# Altium PCB CRM100.PcbDoc
Units mm, origin at the board's own origin, x right, y up, seen from the top; angles counter-clockwise.
Board outline 20 x 22.95 mm, 2 copper layers (Top Layer, Bottom Layer); 8 components, 12 nets, 48 pads, 9 vias.
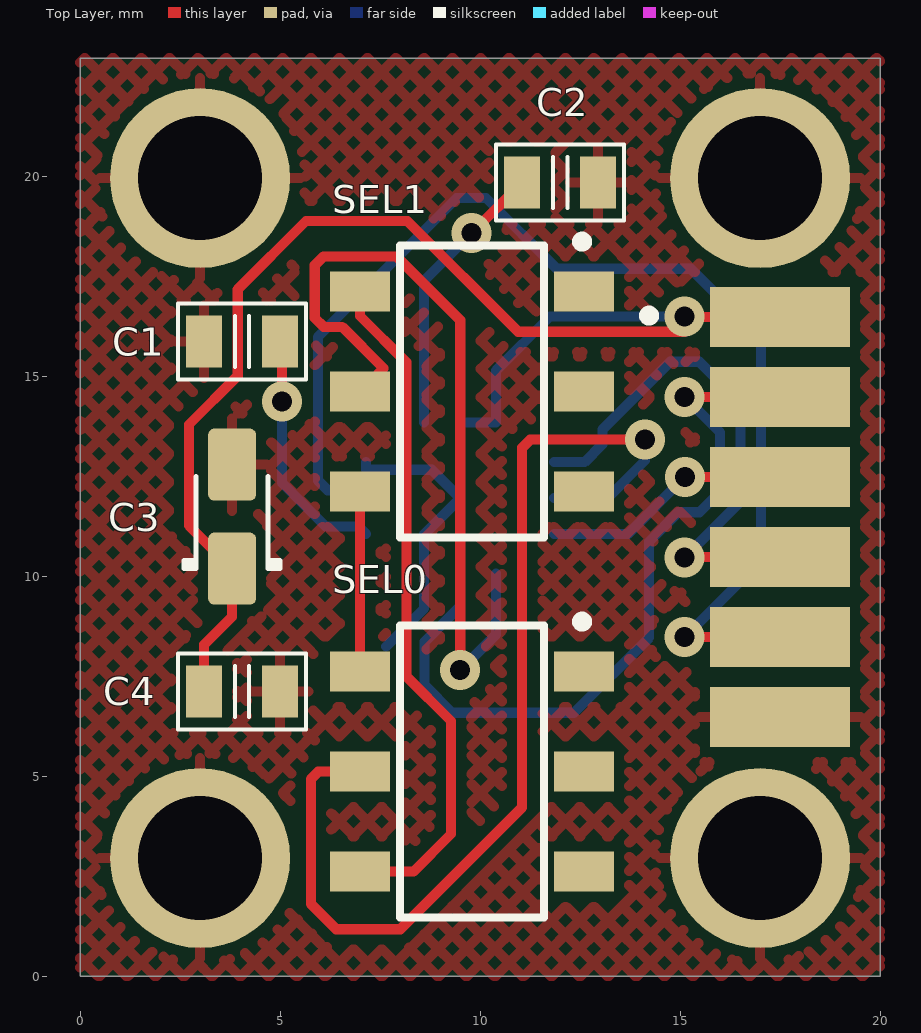
[diagram p0: Top Layer view]
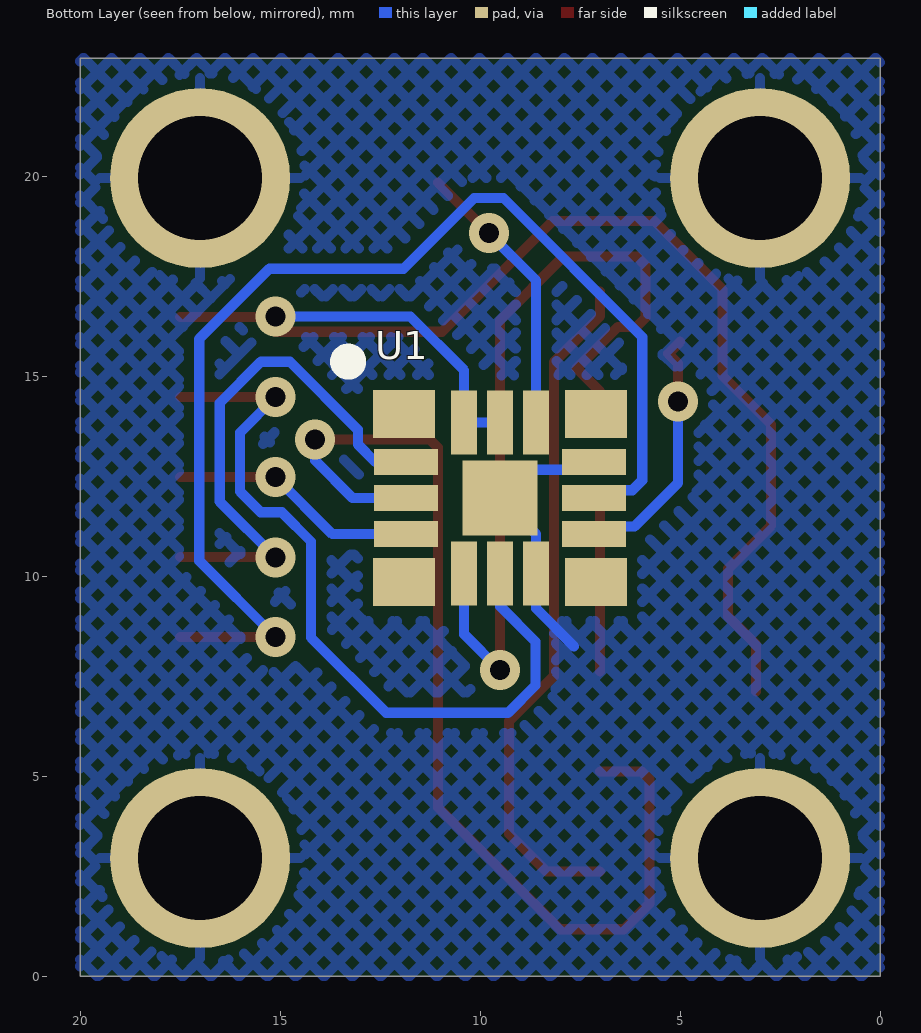
[diagram p1: Bottom Layer view, seen from below]
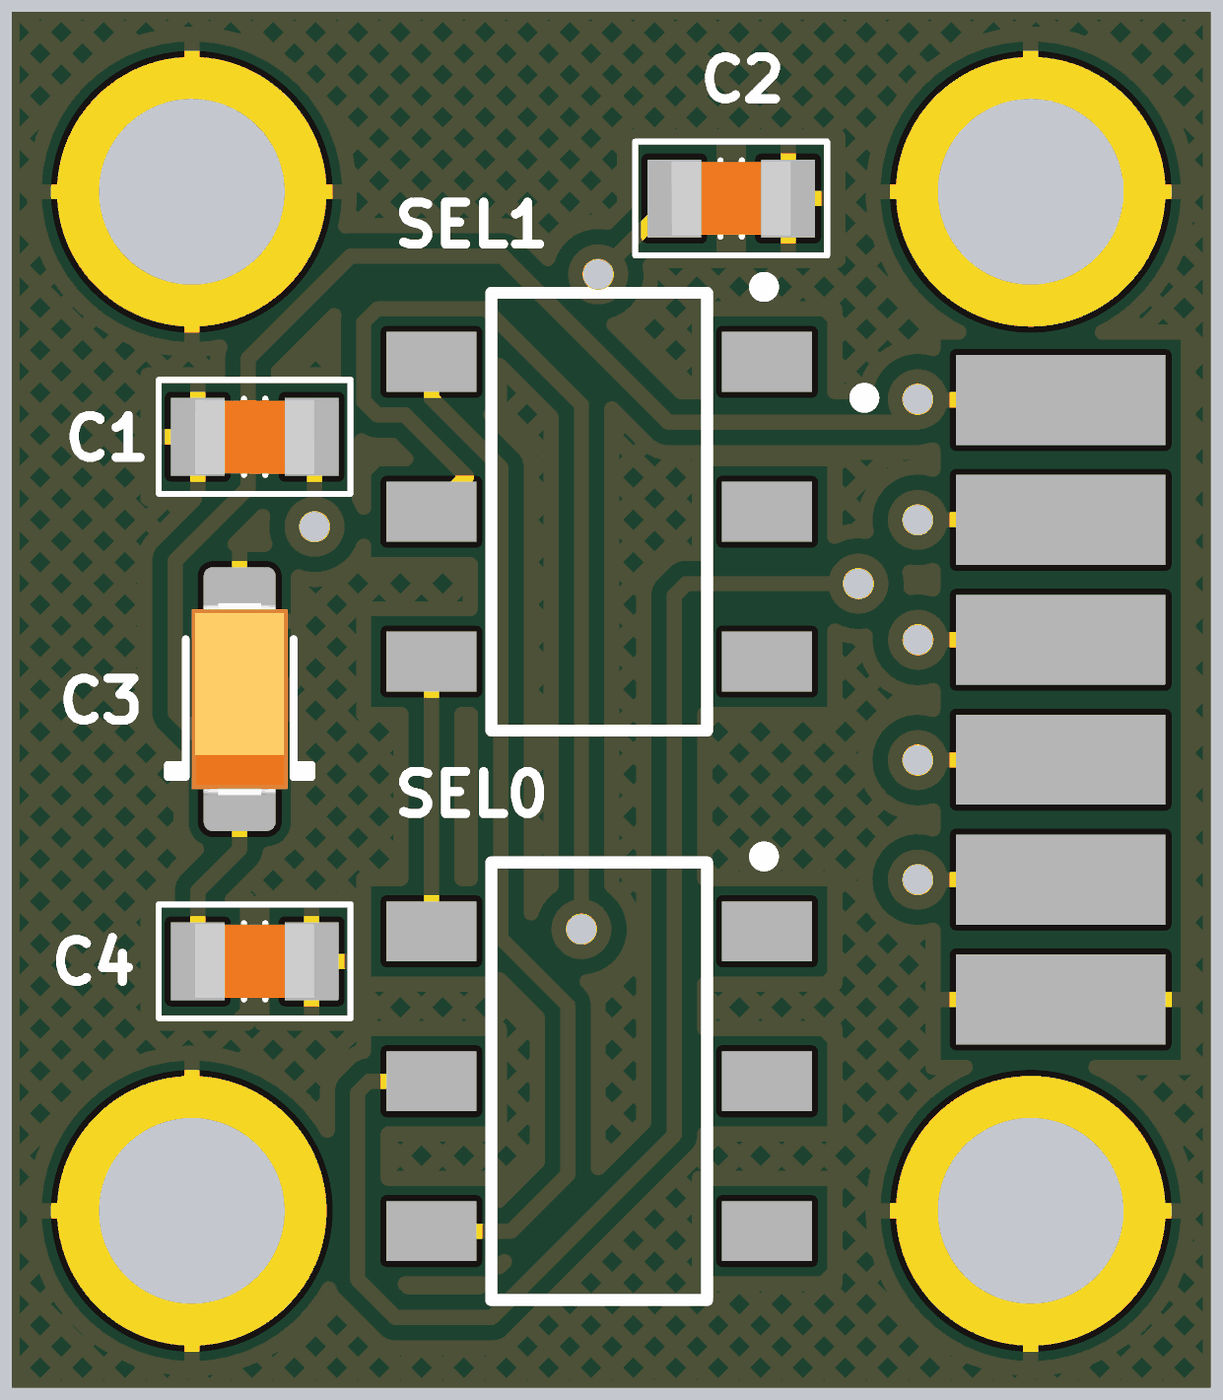
[diagram p2: 3D render of the assembled board from above, using the file's embedded part models]

## Layer stack, top to bottom
Top Solder: solder mask 0.0102, Solder Resist, Dk 3.5
Top Layer: signal copper 0.0356
Dielectric 1: dielectric 0.32, FR-4, Dk 4.8
Bottom Layer: signal copper 0.0356
Bottom Solder: solder mask 0.0102, Solder Resist, Dk 3.5

## Board outline
0,0 0,22.949 20,22.949 20,0

## Design rules (kind name [scope] priority, off if disabled: settings)
Clearance [All] p1: gap=0.254 except(0.1: SMDPad-SMDPad; 0.4: SMDPad-Via)
PolygonConnect [All] p1: connectstyle=Relief reliefconductorwidth=0.254 reliefentries=4 polygonreliefangle="90 Angle" airgapwidth=0.254
RoutingVias [All] p1: holewidth=0.5 width=1 viastyle="Through Hole" minholewidth=0.5 minwidth=1 maxholewidth=0.5 maxwidth=1
SolderMaskExpansion [All] p1: expansion=0.102
UnpouredPolygon [All] p1: allowunpoured=FALSE
Width [All] p1: maxlimit=0.254 minlimit=0.254 preferedwidth=0.254
29 further rules are at their usual default settings.

## Classes and differential pairs
component class CRM100: C1 C2 C3 C4 SEL0 SEL1 U1

## Components (designator, comment, footprint, x,y, rotation, side; value= is the part's Value field where it differs from the comment)
C1 "680pF" C_0805 4.049,15.861 r0 top
C2 "0.1uF" C_0805 12.002,19.836 r180 top
C3 "" CAPMP3216X180N 3.799,11.486 r90 top
C4 "0.1uF" C_0805 4.049,7.111 r180 top
CONN1 "6_pin_plate_conn" 6_pin_plate_conn 17.5,11.475 r0 top
SEL0 "IS-1390 switch" IS1390 9.799,5.111 r0 top
SEL1 "IS-1390 switch" IS1390 9.799,14.611 r0 top
U1 "CRM100 gyroscope" CRM100 9.5,11.949 r180 bottom locked

## Footprints (in the part's own frame and the unit in brackets; to place one, negate y for a bottom-side part, rotate by r counter-clockwise, add the part's x,y. Pads: shape width x height; smd on the part's side, far side on the other; paste and mask are expansions set on the pad)
6_pin_plate_conn [mm]
  rect 3.5x1.5 smd: 1(0,5) 2(0,3) 3(0,1) 4(0,-1) 5(0,-3) 6(0,-5)
C_0805 [mm] "Capacitor Pattern"
  rect 0.9x1.3 smd: 1(-0.95,0) 2(0.95,0)
  silkscreen extent -1.6,-0.95 1.6,0.95, body extent -1,-0.63 1,0.62, height 0.6
CAPMP3216X180N [mm] "Capacitor, polarized, Molded Body, EIA 535BAAC size A; 3.20mm L X 1.60mm W X 1.80mm H"
  round 0.508 on Mech15: 0(0,0)
  rrect25% 1.8x1.2 smd: 1(-1.3,0) 2(1.3,0)
  silkscreen extent -1.3,-1.2 1,1.2, body extent -1.6,-0.8 1.6,0.8, height 1.8
CRM100 [mm]
  rect 1.55x1.2 smd: 1(-2.4,2.1) 5(-2.4,-2.1) 9(2.4,-2.1) 13(2.4,2.1)
  rect 1.6x0.65 smd: 2(-2.35,0.9) 3(-2.35,0) 4(-2.35,-0.9) 10(2.35,-0.9) 11(2.35,0) 12(2.35,0.9)
  rect 0.65x1.6 smd: 6(-0.9,-1.89) 7(0,-1.89) 8(0.9,-1.89) 14(0.9,1.89) 15(0,1.89) 16(-0.9,1.89)
  rect 1.87x1.87 smd: 17(0,0)
  body extent -2.85,-2.39 2.85,2.39, height 1.19
IS1390 [mm] "TSOP, 6-Leads, Body 7,00x3,50mm, Pitch 2,50mm, IPC Low Density"
  rect 1.5x1 smd: 1(2.8,2.5) 2(2.8,0) 3(2.8,-2.5) 4(-2.8,2.5) 5(-2.8,0) 6(-2.8,-2.5)
  silkscreen extent -1.8,-3.65 2.88,3.87, body extent -1.75,-3.5 1.75,3.5, height 1.5

## Part data
C1 C2 C4: library part C0805, "Capacitor"
C3: library part CAP_TANT_TYPE_A, "Capacitor SMD Tantalum 4.7uF 10% 16V 3216-18"
SEL0 SEL1: library part IS-1390
U1: library part CRM100

## Free pads (board coordinates)
  round 4.5 hole 3.1: 1(3,2.949) 1(3,19.949) 1(17,2.949) 1(17,19.949)

## Via types
v1: diameter 1, hole 0.5, Top Layer to Bottom Layer, tented both sides, 9 vias

## Nets (pads, with @x,y where several pads share a name; then routed paths per layer and width w, separated by ;. In a path a pad name is that pad's centre, name@x,y a point inside that pad or via, vN(x,y) a via of type N, cw(c..) or ccw(c..) an arc to the next point about the centre after c; other vN are vias at no path point)
BIT: CONN1.3 U1.4 | length 6.2
  Top Layer w0.254: v1(15.119,12.475) CONN1.3
  Bottom Layer w0.254: U1.4 13.693,11.049 v1(15.119,12.475)
CBIT: CONN1.4 U1.2 | length 13.2
  Top Layer w0.254: v1(15.116,10.467) 15.123,10.475 CONN1.4
  Bottom Layer w0.254: U1.2 12.614,12.849 13.056,13.291 13.056,13.661 14.751,15.356 15.481,15.356 16.508,14.328 16.508,11.86 v1(15.116,10.467)
GND: C1.1 C2.1 C3.2 C4.1 CONN1.6 pad.1 U1.8 U1.12 U1.17 | length 7.3
  Bottom Layer w0.254: U1.12 7.15,12.658 8.791,12.658 U1.17 8.6,11.049 U1.8 8.6,9.187 7.649,8.236
NetC1_2: C1.2 U1.10 | length 6.4
  Top Layer w0.254: C1.2 5.299,15.561 5.049,15.311 v1(5.049,14.361)
  Bottom Layer w0.254: v1(5.049,14.361) 5.049,12.331 6.137,11.243 6.956,11.243 U1.10
NetC2_2: C2.2 U1.14 | length 7
  Top Layer w0.254: v1(9.782,18.57) 9.786,18.57 C2.2
  Bottom Layer w0.254: U1.14 8.6,17.388 v1(9.782,18.57)
NetSEL0_4: SEL0.4 SEL1.6 | length 4.5
  Top Layer w0.254: SEL0.4 SEL1.6
NetSEL0_5: SEL0.5 U1.3 | length 26.6
  Top Layer w0.254: SEL0.5 5.956,5.111 5.769,4.924 5.769,1.806 6.404,1.171 8.004,1.171 11.052,4.219 11.052,13.211 11.252,13.411 v1(14.124,13.411)
  Bottom Layer w0.254: U1.3 13.185,11.949 14.124,12.888 v1(14.124,13.411)
NetSEL0_6: SEL0.6 SEL1.4 | length 17.2
  Top Layer w0.254: SEL0.6 8.334,2.611 9.274,3.551 9.274,6.378 8.156,7.496 8.156,15.344 6.999,16.501 SEL1.4
NetSEL1_5: SEL1.5 U1.6 | length 20.3
  Top Layer w0.254: SEL1.5 7.585,15.197 6.552,16.23 6.091,16.23 5.868,16.453 5.868,17.769 6.091,17.992 7.907,17.992 9.502,16.396 v1(9.502,7.648)
  Bottom Layer w0.254: v1(9.502,7.648) 10.4,8.546 U1.6
RATE_OUT: CONN1.2 U1.7 | length 19.6
  Top Layer w0.254: v1(15.116,14.475) CONN1.2
  Bottom Layer w0.254: U1.7 9.5,9.247 8.613,8.36 8.613,7.267 9.299,6.581 12.347,6.581 14.227,8.461 14.227,10.864 14.956,11.594 15.484,11.594 16,12.11 16,12.361 16,13.59 v1(15.116,14.475)
RESET: CONN1.5 U1.11 | length 30
  Top Layer w0.254: v1(15.116,8.475) CONN1.5
  Bottom Layer w0.254: U1.11 7.344,12.143 6.192,12.143 5.944,12.391 5.944,15.978 9.417,19.451 10.147,19.451 11.917,17.681 15.268,17.681 17.021,15.928 17.021,10.38 v1(15.116,8.475)
VCC: C3.1 C4.2 CONN1.1 U1.15 U1.16 | length 36.9
  Top Layer w0.254: C4.2 3.099,8.283 3.799,8.983 C3.1 2.724,11.261 2.724,13.79 3.94,15.006 3.94,17.168 5.647,18.875 8.182,18.875 10.95,16.106 15.116,16.106 15.116,16.475 v1@15.122,16.481 ; v1(15.116,16.487) v1@15.122,16.481 ; v1@15.122,16.481 CONN1.1 15.129,16.475 v1@15.122,16.481
  Bottom Layer w0.254: U1.15 U1.16 10.4,15.141 11.746,16.487 v1(15.116,16.487)
pads on no net: C3.0 SEL0.1 SEL0.2 SEL0.3 SEL1.1 SEL1.2 SEL1.3 U1.1 U1.5 U1.9 U1.13

## Polygon pours and split planes (outlines as drawn)
GND on Top Layer "top_gnd_polygon" (hatched 45Degree grid 0.5 track 0.254, pour order 2): 0,22.949 20,22.949 20,0 0,0
GND on Bottom Layer "top_gnd_polygon" (hatched 45Degree grid 0.5 track 0.254, pour order 4): 0,22.949 20,22.949 20,0 0,0 0,22.949

## Silkscreen, mask and mechanical layers (free items; w line width, h text height)
Top Overlay:
  circle w0.25: c14.224,16.511 r0.125
Bottom Overlay:
  circle w0.5: c13.299,15.361 r0.2
Mechanical 13:
  the board outline again, w0.254